# Altium PCB Placa.PcbDoc
Units mm, origin at the board's own origin, x right, y up, seen from the top; angles counter-clockwise.
Board outline 67.31 x 63.5 mm, 2 copper layers (Top Layer, Bottom Layer); 28 components, 18 nets, 63 pads, 6 vias.
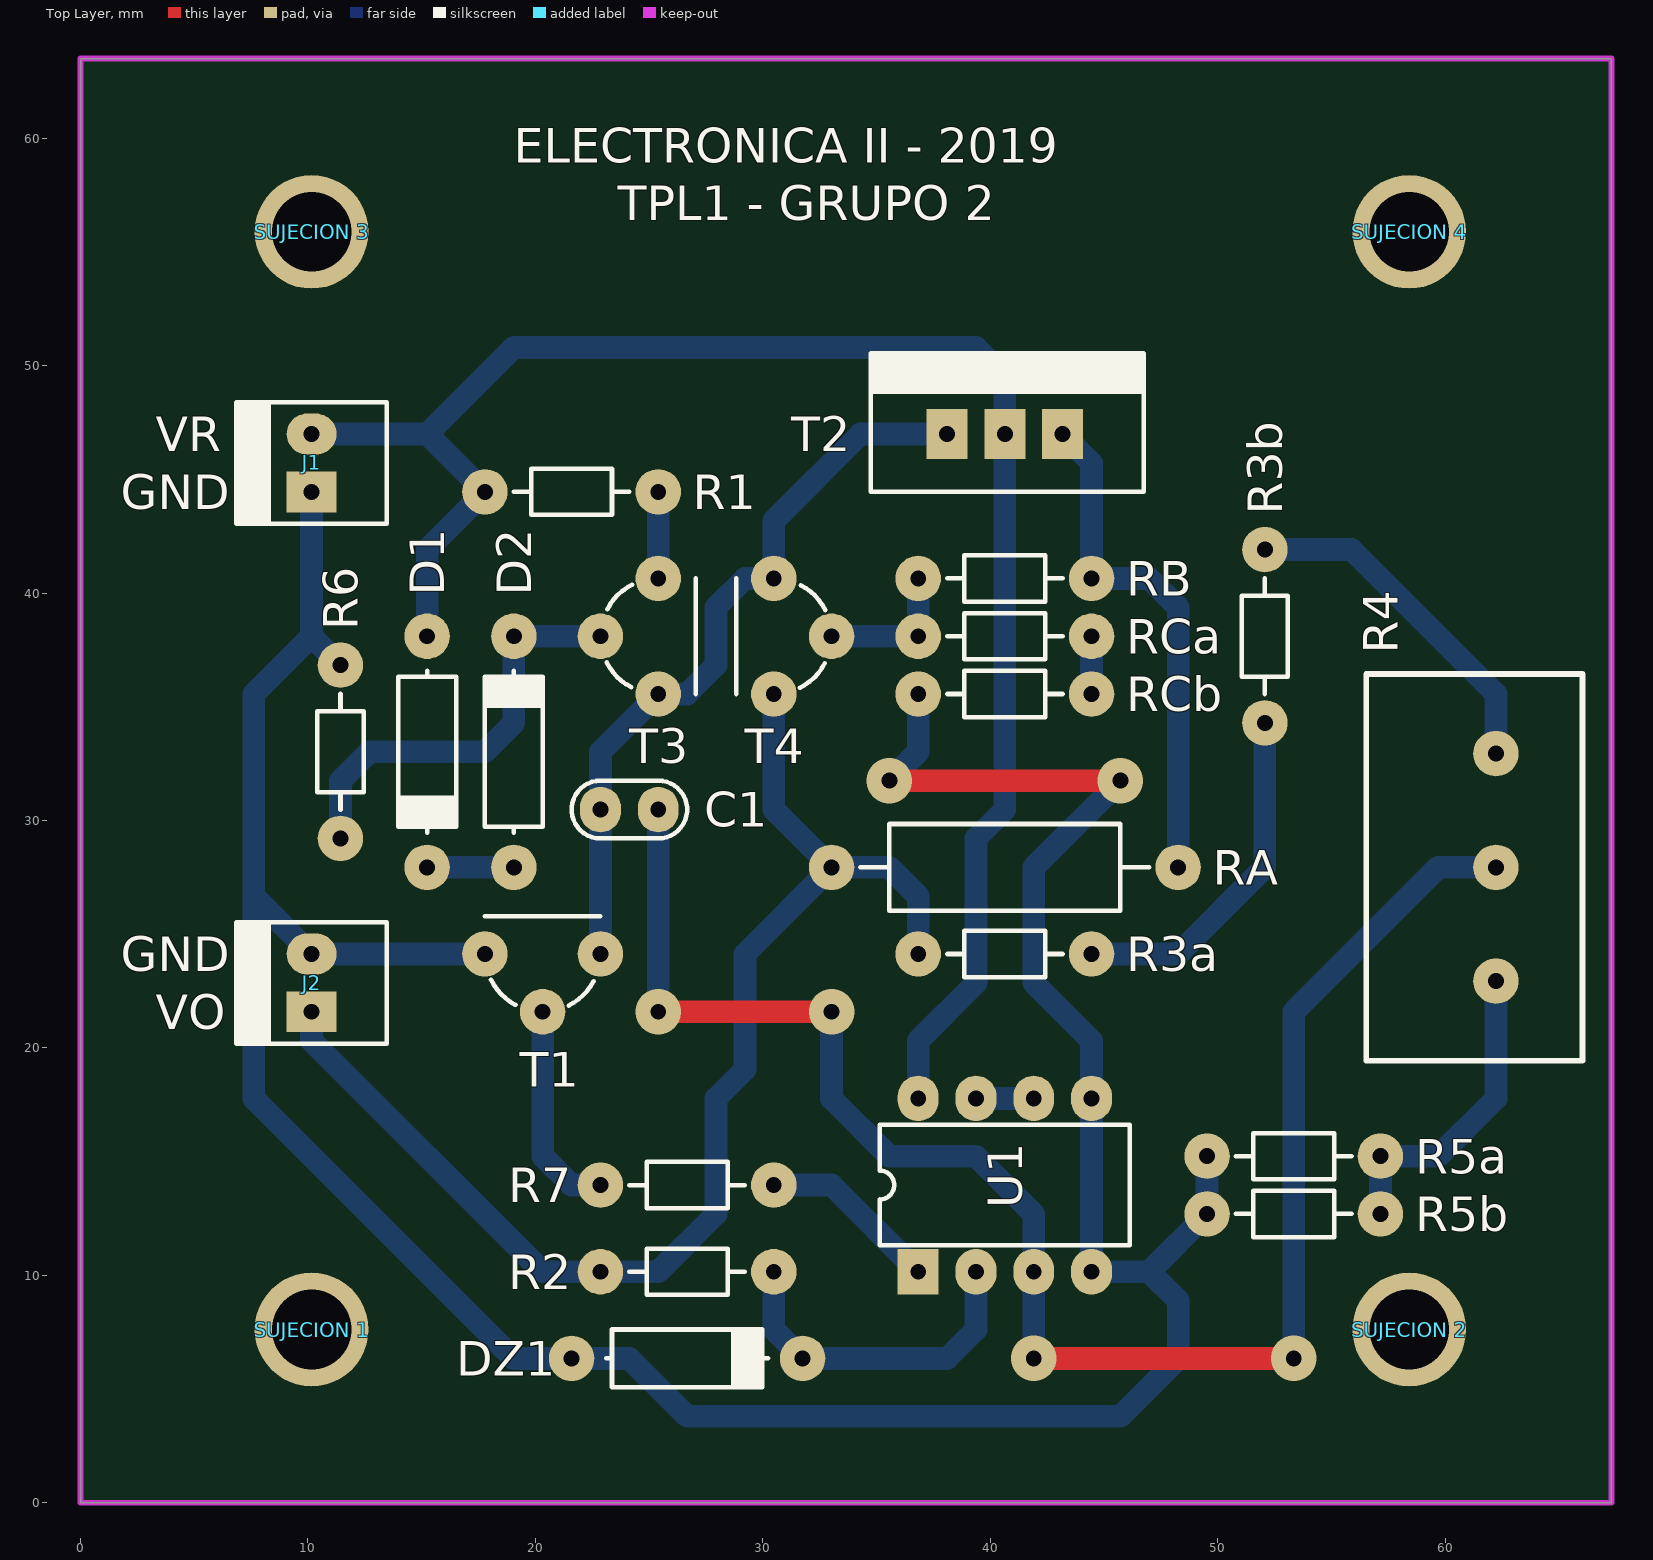
[diagram p0: Top Layer view]
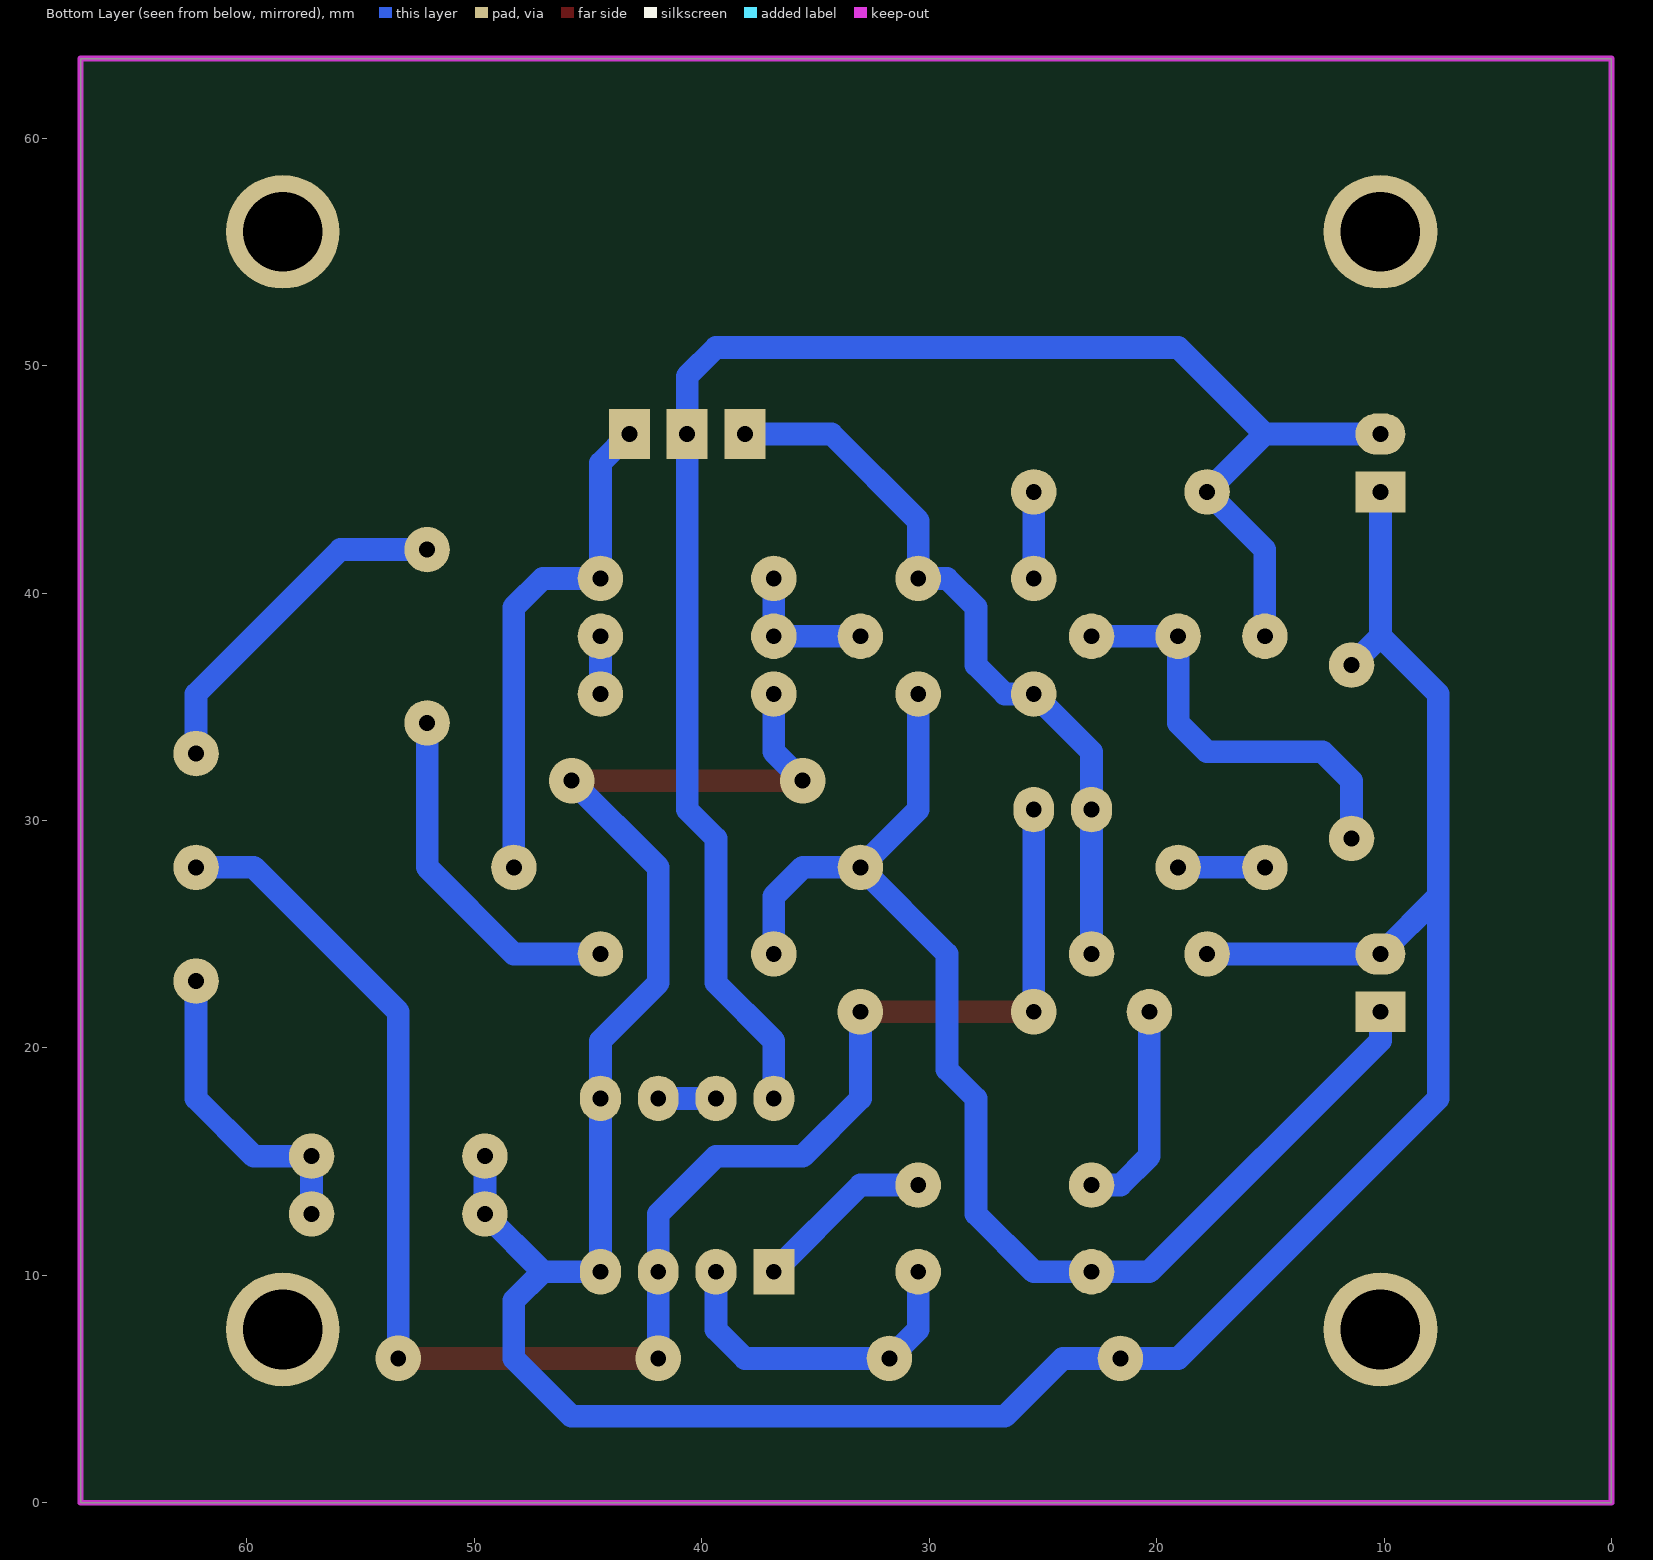
[diagram p1: Bottom Layer view, seen from below]
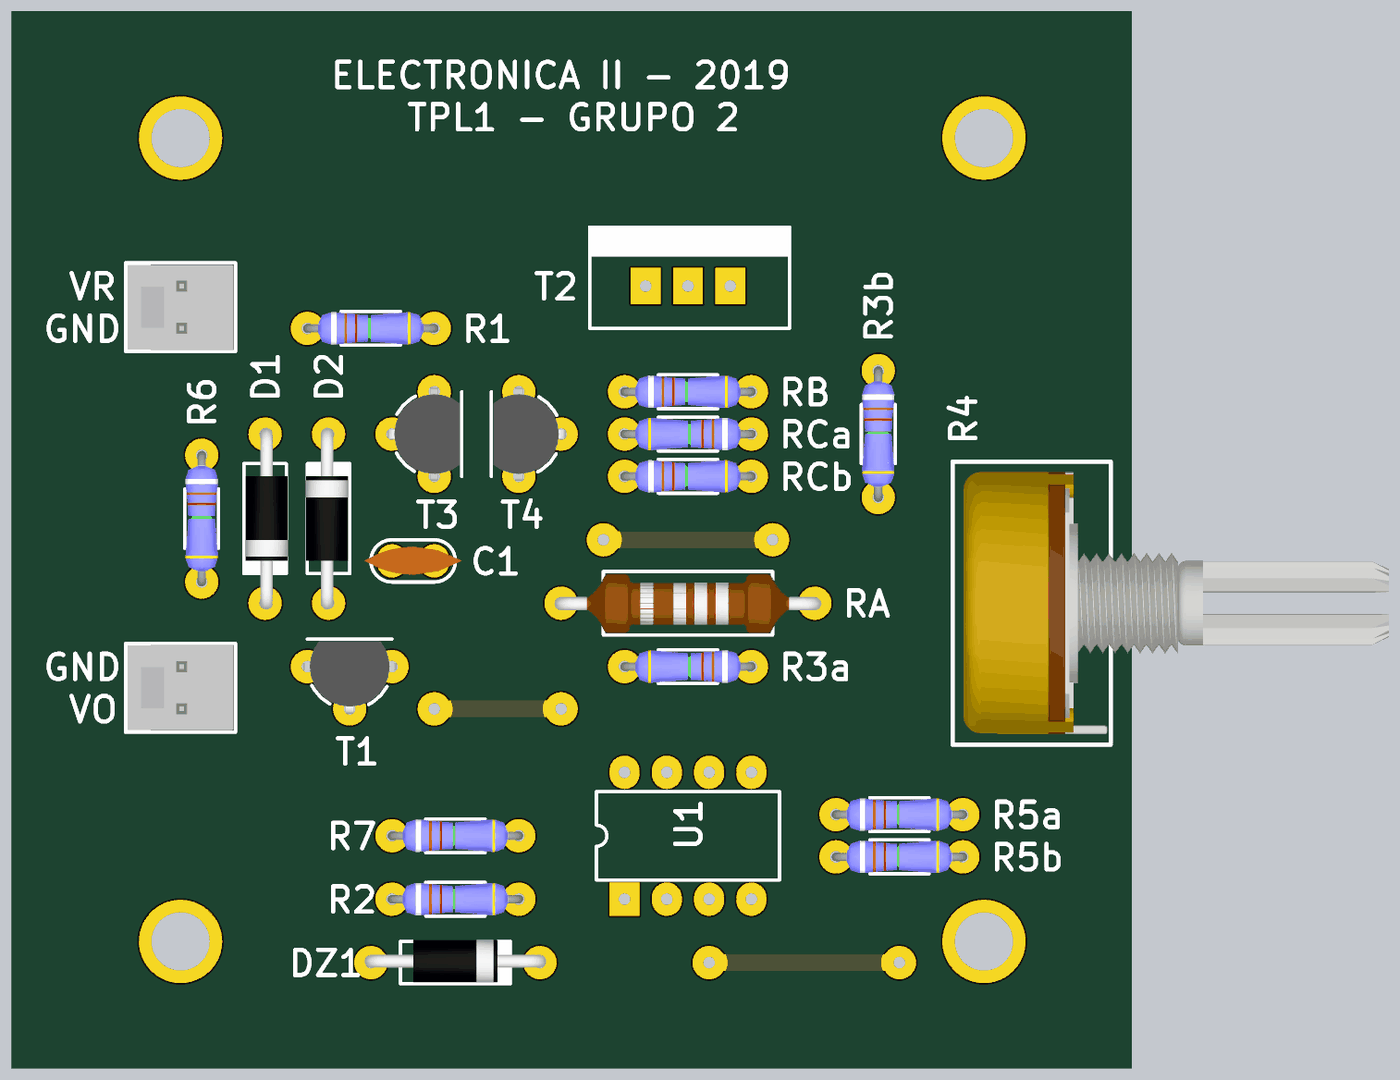
[diagram p2: 3D render of the assembled board from above, using the file's embedded part models]

## Layer stack, top to bottom
Top Solder: solder mask 0.0102, Solder Resist, Dk 3.5
Top Layer: signal copper 0.0356
Dielectric 1: dielectric 0.32, FR-4, Dk 4.8
Bottom Layer: signal copper 0.0356
Bottom Solder: solder mask 0.0102, Solder Resist, Dk 3.5

## Board outline
0,0 0,63.5 67.31,63.5 67.31,0

## Design rules (kind name [scope] priority, off if disabled: settings)
Clearance [All] p1: gap=0.7
PolygonConnect [All] p1: connectstyle=Relief reliefconductorwidth=0.254 reliefentries=4 polygonreliefangle="90 Angle" airgapwidth=0.254
RoutingVias [All] p1: holewidth=0.7 width=2 viastyle="Through Hole" minholewidth=0.7 minwidth=2 maxholewidth=0.7 maxwidth=2
SolderMaskExpansion [All] p1: expansion=0.102
Width [All] p1: maxlimit=1 minlimit=0.6 preferedwidth=1
30 further rules are at their usual default settings.

## Components (designator, comment, footprint, x,y, rotation, side; value= is the part's Value field where it differs from the comment)
C1 "330p" CAP100 24.13,30.48 r0 top
D1 "1N4148" DO41 15.24,33.02 r270 top
D2 "1N4148" DO41 19.05,33.02 r90 top
DZ1 "1N5223" DO41 26.67,6.35 r0 top
J1 "VR" MOLEX2 10.16,44.45 r90 top
J2 "OUT" MOLEX2 10.16,21.59 r90 top
R1 "180" RES300 17.78,44.45 r0 top
R2 "1K" RES300 22.86,10.16 r0 top
R3a "1K8" RES300 44.45,24.13 r180 top
R3b "4K7" RES300 52.07,41.91 r270 top
R4 "10K" POTENCIOMETRO 62.23,27.94 r90 top
R5a "6K8" RES300 49.53,15.24 r0 top
R5b "47K" RES300 49.53,12.7 r0 top
R6 "2K7" RES300 11.43,36.83 r270 top
R7 "100K" RES300 22.86,13.97 r0 top
RA "1" RES600 48.26,27.94 r180 top
RB "1K" RES300 36.83,40.64 r0 top
RCa "10K" RES300 44.45,38.1 r180 top
RCb "1K" RES300 36.83,35.56 r0 top
"SUJECION 1" "SUJECION" "SUJECION (5.00MM - 3.50MM)" 10.16,7.62 r90 top
"SUJECION 2" "SUJECION" "SUJECION (5.00MM - 3.50MM)" 58.42,7.62 r90 top
"SUJECION 3" "SUJECION" "SUJECION (5.00MM - 3.50MM)" 10.16,55.88 r90 top
"SUJECION 4" "SUJECION" "SUJECION (5.00MM - 3.50MM)" 58.42,55.88 r90 top
T1 "BC547C" TO92 20.32,22.86 r0 top
T2 "TIP112" "TO-220 V" 40.64,46.99 r0 top
T3 "BC327" TO92 24.13,38.1 r270 top
T4 "BC337" TO92 31.75,38.1 r90 top
U1 "LM358AP" P008 40.64,13.97 r0 top

## Footprints (in the part's own frame and the unit in brackets; to place one, negate y for a bottom-side part, rotate by r counter-clockwise, add the part's x,y. Pads: shape width x height; smd on the part's side, far side on the other; paste and mask are expansions set on the pad)
CAP100 [mm]
  oval 1.8x2 hole 0.7: 1(-1.27,0) 2(1.27,0)
  silkscreen extent -2.54,-1.27 2.54,1.27, body extent -2.92,-0.84 2.92,0.86, height 6.12
DO41 [mm]
  round 2 hole 0.7: 1(-5.08,0) 2(5.08,0)
  silkscreen extent -3.56,-1.27 3.56,1.27, body extent -5.46,-1.19 5.46,1.37, height 2.03
MOLEX2 [mm]
  rect 1.8x2.2 hole 0.7: 1(0,0)
  oval 1.8x2.2 hole 0.7: 2(2.54,0)
  silkscreen extent -1.4,-3.3 3.94,3.3, body extent -1.27,-3.17 3.81,3.18, height 10.74
P008 [mm] "DIP; 8 Leads; Row Spacing 7.62 mm; Pitch 2.54 mm"
  rect 1.8x2 hole 0.7: 1(-3.81,-3.81)
  oval 1.8x2 hole 0.7: 2(-1.27,-3.81) 3(1.27,-3.81) 4(3.81,-3.81) 5(3.81,3.81) 6(1.27,3.81) 7(-1.27,3.81) 8(-3.81,3.81)
  silkscreen extent -5.5,-2.65 5.5,2.65
POTENCIOMETRO [mm]
  round 2 hole 0.7: 1(-5,0) 2(0,0) 3(5,0)
  silkscreen extent -8.5,-3.8 8.5,5.7, body extent -7.87,-20.53 7.87,5.03, height 20.12
RES300 [mm]
  round 2 hole 0.7: 1(0,0) 2(7.62,0)
  silkscreen extent 1.27,-1.02 6.35,1.02, body extent -0.25,-0.97 7.87,0.97, height 2.01
RES600 [mm]
  round 2 hole 0.7: 1(0,0) 2(15.24,0)
  silkscreen extent 1.27,-1.9 13.97,1.91, body extent -0.4,-1.72 15.64,1.78, height 3.59
"SUJECION (5.00MM - 3.50MM)" [mm]
  round 5 hole 3.5: 1(0,0)
TO92 [mm]
  round 2 hole 0.7: 1(0,-1.27) 2(2.54,1.27) 3(-2.54,1.27)
  silkscreen extent -2.54,-1 2.54,2.92, body extent -2.79,-1.55 2.79,2.79, height 8
"TO-220 V" [mm]
  rect 1.8x2.2 hole 0.7: 1(-2.54,0) 2(0,0) 3(2.54,0)
  silkscreen extent -5.9,-2.54 6.1,3.54, body extent -5,-2 5,3, height 18

## Part data
C1: library part CAP
D1 D2: library part "DIODO SCHOTTKY"
DZ1: library part "DIODO ZENER"
J1 J2: library part MOLEX2
R1 R2 R3a R3b R5a R5b R6 R7 RA RB RCa RCb: library part RES
R4: library part POTENCIOMETRO
T1 T2 T4: library part "TRANSISTOR NPN"
T3: library part "TRANSISTOR PNP"
U1: "Dual Operational Amplifier"

## Via types
v1: diameter 2, hole 0.7, Top Layer to Bottom Layer, 6 vias

## Nets (pads, with @x,y where several pads share a name; then routed paths per layer and width w, separated by ;. In a path a pad name is that pad's centre, name@x,y a point inside that pad or via, vN(x,y) a via of type N, cw(c..) or ccw(c..) an arc to the next point about the centre after c; other vN are vias at no path point)
GND: DZ1.1 J1.1 J2.2 R5a.1 R5b.1 R6.1 RCb.1 T1.3 U1.4 U1.5 | length 139.9
  Top Layer w1: v1(35.56,31.75) v1(45.72,31.75)
  Bottom Layer w1: J1.1 10.16,38.1 ; R6.1 10.16,38.1 ; T1.3 J2.2 7.62,26.67 ; v1(35.56,31.75) 36.83,33.02 RCb.1 ; v1(45.72,31.75) 41.91,27.94 41.91,22.86 44.45,20.32 U1.5 U1.4 46.99,10.16 ; R5a.1 R5b.1 46.99,10.16 ; 7.62,26.67 7.62,17.78 19.05,6.35 DZ1.1 24.13,6.35 26.67,3.81 45.72,3.81 48.26,6.35 48.26,8.89 46.99,10.16 ; 7.62,26.67 7.62,35.56 10.16,38.1
NetC1_1: C1.1 T1.2 T2.1 T3.2 T4.2 | length 32.9
  Bottom Layer w1: T1.2 C1.1 22.86,33.02 T3.2 26.67,35.56 27.94,36.83 27.94,39.37 29.21,40.64 T4.2 30.48,43.18 34.29,46.99 T2.1
NetC1_2: C1.2 R4.2 U1.3 | length 75.9
  Top Layer w1: v1(25.4,21.59) v1(33.02,21.59) ; v1(41.91,6.35) v1(53.34,6.35)
  Bottom Layer w1: v1(25.4,21.59) C1.2 ; v1(33.02,21.59) 33.02,17.78 35.56,15.24 39.37,15.24 41.91,12.7 U1.3 v1(41.91,6.35) ; v1(53.34,6.35) 53.34,21.59 59.69,27.94 R4.2
NetD1_2: D1.2 D2.1 | length 3.8
  Bottom Layer w1: D1.2 D2.1
NetD2_2: D2.2 R6.2 T3.1 | length 18.8
  Bottom Layer w1: R6.2 11.43,31.75 12.7,33.02 17.78,33.02 19.05,34.29 D2.2 T3.1
NetDZ1_2: DZ1.2 R2.2 U1.2 | length 15
  Bottom Layer w1: R2.2 30.48,7.62 DZ1.2 38.1,6.35 39.37,7.62 U1.2
NetR1_2: R1.2 T3.3 | length 3.8
  Bottom Layer w1: T3.3 R1.2
NetR3a_1: R3a.1 R3b.2 | length 15.5
  Bottom Layer w1: R3a.1 48.26,24.13 52.07,27.94 R3b.2
NetR3b_1: R3b.1 R4.3 | length 15.4
  Bottom Layer w1: R3b.1 55.88,41.91 62.23,35.56 R4.3
NetR4_1: R4.1 R5a.2 R5b.2 | length 13.8
  Bottom Layer w1: R5b.2 R5a.2 59.69,15.24 62.23,17.78 R4.1
NetR7_1: R7.1 T1.1 | length 9.4
  Bottom Layer w1: T1.1 20.32,15.24 21.59,13.97 R7.1
NetR7_2: R7.2 U1.1 | length 7.9
  Bottom Layer w1: R7.2 33.02,13.97 U1.1
NetRA_1: RA.1 RB.2 T2.3 | length 22.6
  Bottom Layer w1: T2.3 44.45,45.72 RB.2 46.99,40.64 48.26,39.37 RA.1
NetRB_1: RB.1 RCa.2 T4.1 | length 6.3
  Bottom Layer w1: T4.1 RCa.2 RB.1
NetRCa_1: RCa.1 RCb.2 | length 2.5
  Bottom Layer w1: RCb.2 RCa.1
NetU1_6: U1.6 U1.7 | length 2.5
  Bottom Layer w1: U1.7 U1.6
VO: J2.1 R2.1 R3a.2 RA.2 T4.3 | length 57.2
  Bottom Layer w1: J2.1 10.16,20.32 20.32,10.16 R2.1 25.4,10.16 27.94,12.7 27.94,17.78 29.21,19.05 29.21,24.13 RA.2 ; T4.3 30.48,30.48 RA.2 ; R3a.2 36.83,26.67 35.56,27.94 RA.2
VR: D1.1 J1.2 R1.1 T2.2 U1.8 | length 76.9
  Bottom Layer w1: J1.2 15.24,46.99 ; D1.1 15.24,41.91 R1.1 15.24,46.99 ; U1.8 36.83,20.32 39.37,22.86 39.37,29.21 40.64,30.48 T2.2 40.64,49.53 39.37,50.8 19.05,50.8 15.24,46.99
pads on no net: "SUJECION 1.1" "SUJECION 2.1" "SUJECION 3.1" "SUJECION 4.1"

## Keep-outs
Keep-Out Layer:
  the board outline again, w0.254

## Silkscreen, mask and mechanical layers (free items; w line width, h text height)
Top Overlay:
  text "ELECTRONICA II - 2019" at 19.05,58.928 h1.52
  text "TPL1 - GRUPO 2" at 23.622,56.388 h1.52
  text "VR" at 3.302,46.228 h1.52
  text "GND" at 1.778,43.688 h1.52
  text "GND" at 1.778,23.368 h1.52
  text "VO" at 3.302,20.828 h1.52